# Altium PCB LY-3axis-4.0-v2.0-.PcbDoc (part 1 of 2)
Units mil, origin at the board's own origin, x right, y up, seen from the top; angles counter-clockwise.
Board outline 3940.6 x 3390.19 mil, 2 copper layers (TopLayer, BottomLayer); 147 components, 116 nets, 484 pads, 347 vias.
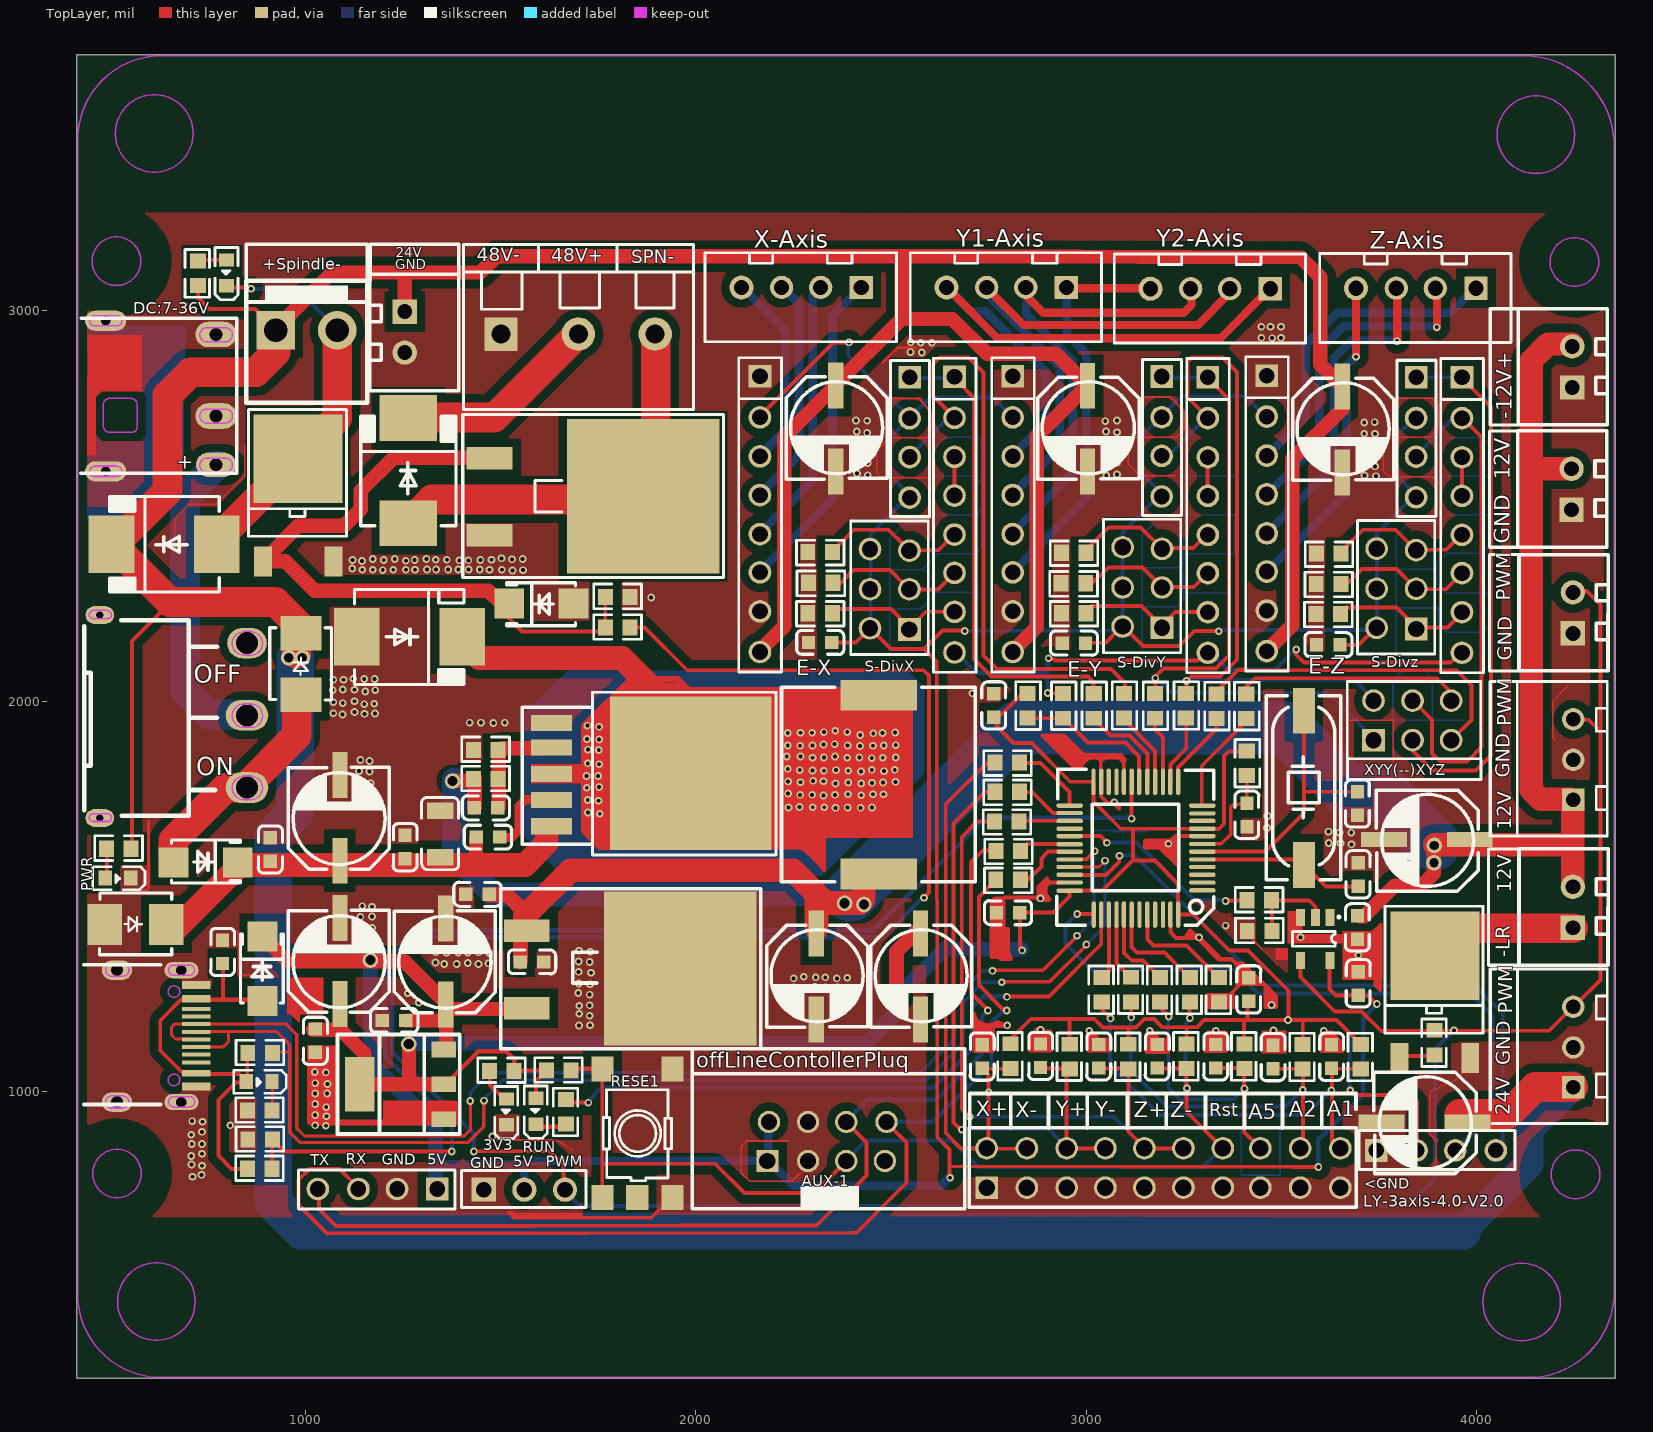
[diagram p0: TopLayer view]
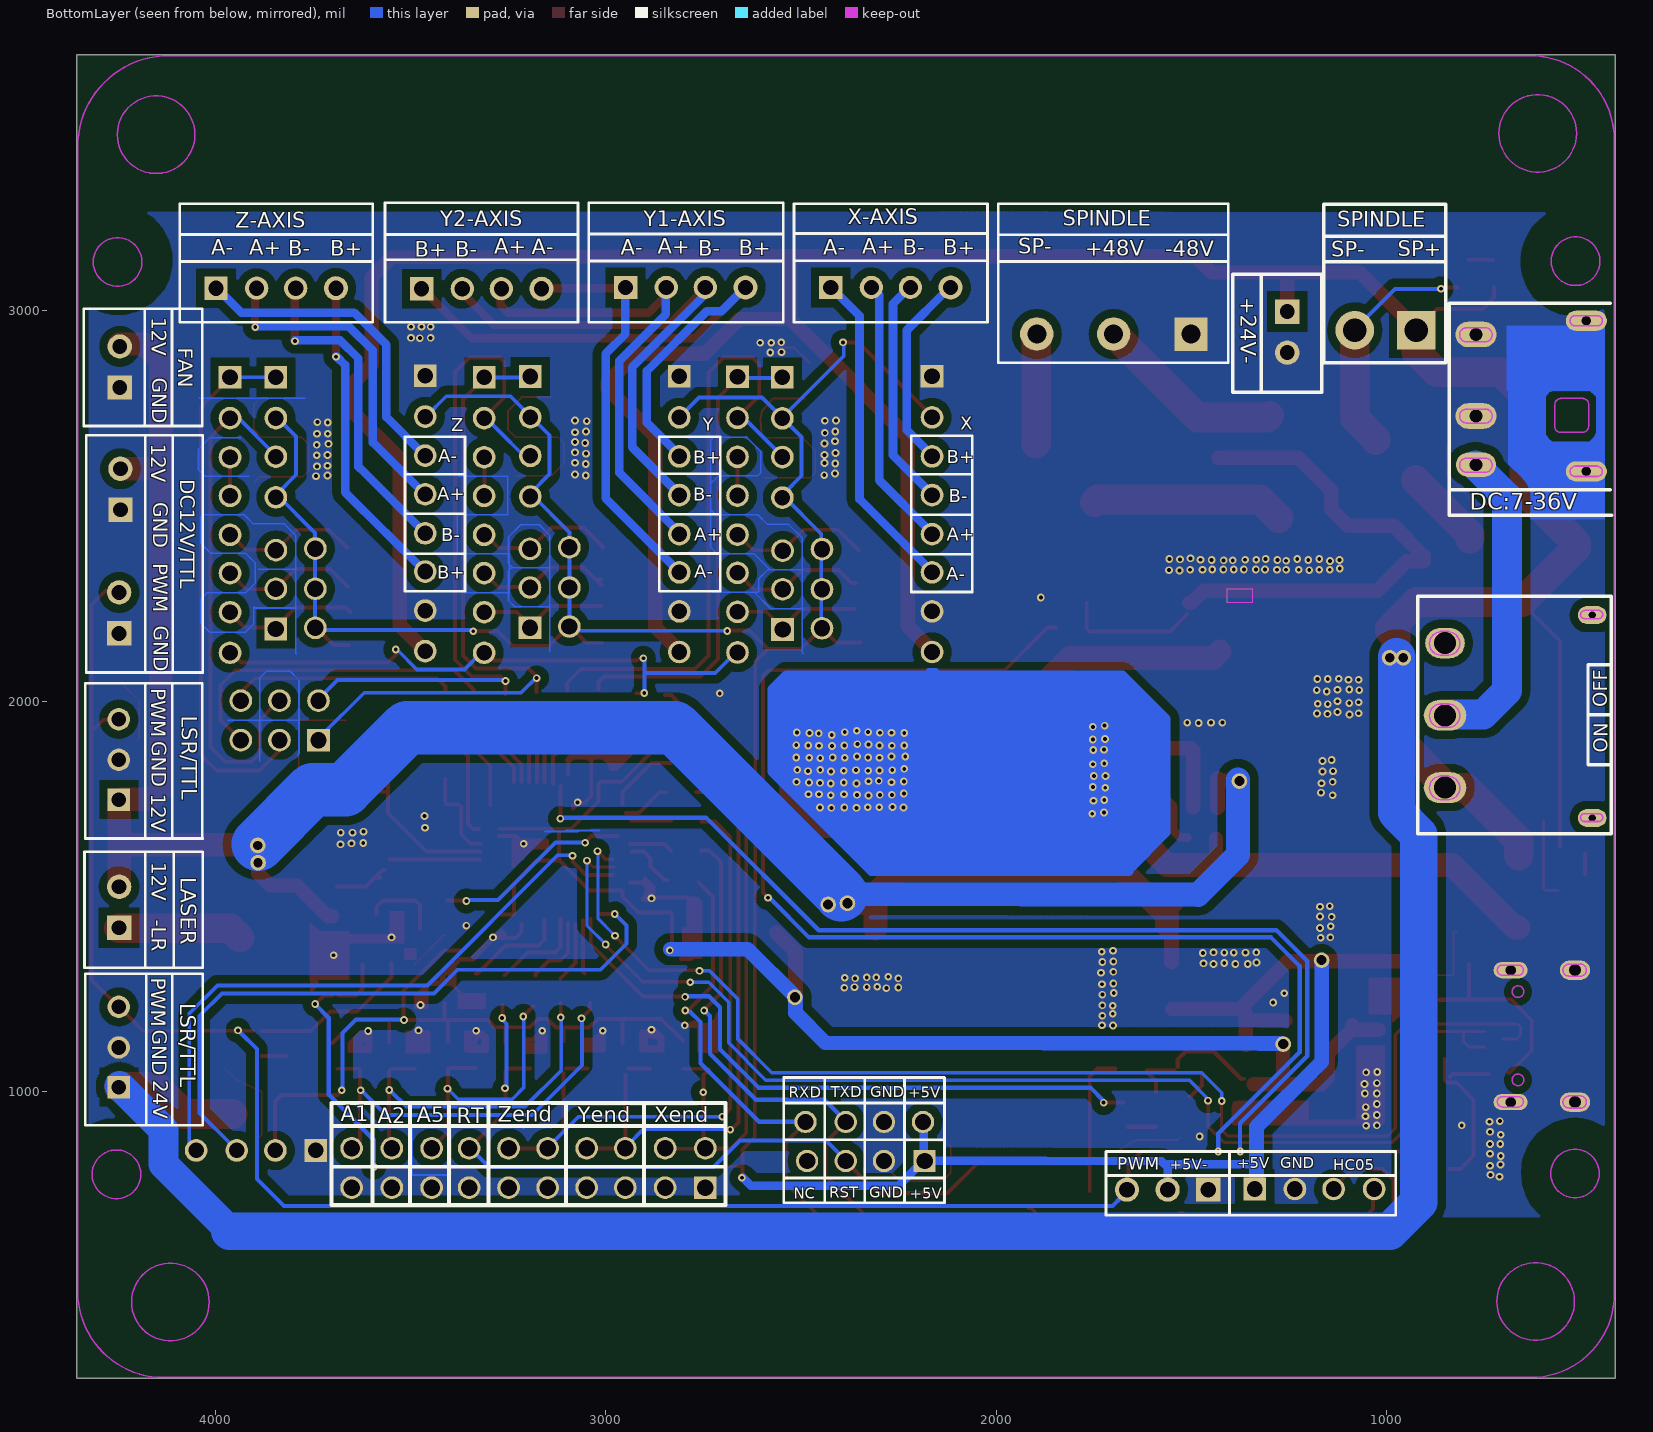
[diagram p1: BottomLayer view, seen from below]

## Layer stack, top to bottom
TopSolder: solder mask 0.4, Solder Resist, Dk 3.5
TopLayer: signal copper 1.4
Dielectric1: core 12.6, FR-4, Dk 4.8
BottomLayer: signal copper 1.4
BottomSolder: solder mask 0.4, Solder Resist, Dk 3.5

## Board outline
414.7,265.53 4355.3,265.53 4355.3,3655.72 414.7,3655.72

## Design rules (kind name [scope] priority, off if disabled: settings)
AssemblyTestPointUsage [All] p0: scope1count=1 scope1_0_kind=Board scope1_0_value=Board scope2count=1 scope2_0_kind=Board scope2_0_value=Board commentlength=0
AssemblyTestpoint [All] p0: scope1count=1 scope1_0_kind=Board scope1_0_value=Board scope2count=1 scope2_0_kind=Board scope2_0_value=Board commentlength=0
Clearance [All] p0: scope1count=1 scope1_0_kind=Board scope1_0_value=Board scope2count=1 scope2_0_kind=Board scope2_0_value=Board commentlength=0 gap=7.87
Clearance [All] p1: gap=7.87
ComponentClearance [All] p0: scope1count=1 scope1_0_kind=Board scope1_0_value=Board scope2count=1 scope2_0_kind=Board scope2_0_value=Board commentlength=0 gap=10 collisioncheckmode=3
DiffPairsRouting [All] p0: scope1count=1 scope1_0_kind=Board scope1_0_value=Board scope2count=1 scope2_0_kind=Board scope2_0_value=Board commentlength=0
FabricationTestPointUsage TestPointUsage [All] p0: scope1count=1 scope1_0_kind=Board scope1_0_value=Board scope2count=1 scope2_0_kind=Board scope2_0_value=Board commentlength=0 valid=0 allowmultiple=FALSE
FabricationTestPointUsage TestPointUsage [All] p1: valid=0 allowmultiple=FALSE
FabricationTestpoint Testpoint [All] p0: scope1count=1 scope1_0_kind=Board scope1_0_value=Board scope2count=1 scope2_0_kind=Board scope2_0_value=Board commentlength=0 side=3 testpointundercomponent=TRUE minsize=40 maxsize=100 preferedsize=60 minholesize=20 maxholesize=40 preferedholesize=32 testpointgrid=1
FabricationTestpoint Testpoint [All] p1: side=3 testpointundercomponent=TRUE minsize=40 maxsize=100 preferedsize=60 minholesize=20 maxholesize=40 preferedholesize=32 testpointgrid=1 allowsidetop=TRUE allowsidebottom=TRUE usegrid=TRUE gridtolerance=0.01
FanoutControl Fanout_Default [All] p0: scope1count=1 scope1_0_kind=Board scope1_0_value=Board scope2count=1 scope2_0_kind=Board scope2_0_value=Board commentlength=30 // Fanout_Default (Default Rule)
FanoutControl Fanout_Small [All] p0 off: scope1count=1 scope1_0_kind=Board scope1_0_value=Board scope2count=1 scope2_0_kind=Board scope2_0_value=Board commentlength=84 // Protel DXP Scope 1 Expression Was: (CompPinCount < 5)   Fanout_Small (Default Rule)
FanoutControl Fanout_SOIC [All] p0 off: scope1count=1 scope1_0_kind=Board scope1_0_value=Board scope2count=1 scope2_0_kind=Board scope2_0_value=Board commentlength=71 // Protel DXP Scope 1 Expression Was: IsSOIC   Fanout_SOIC (Default Rule)
FanoutControl Fanout_LCC [All] p0 off: scope1count=1 scope1_0_kind=Board scope1_0_value=Board scope2count=1 scope2_0_kind=Board scope2_0_value=Board commentlength=69 // Protel DXP Scope 1 Expression Was: IsLCC   Fanout_LCC (Default Rule)
FanoutControl Fanout_BGA [All] p0 off: scope1count=1 scope1_0_kind=Board scope1_0_value=Board scope2count=1 scope2_0_kind=Board scope2_0_value=Board commentlength=69 // Protel DXP Scope 1 Expression Was: IsBGA   Fanout_BGA (Default Rule)
Height [All] p0: scope1count=1 scope1_0_kind=Board scope1_0_value=Board scope2count=1 scope2_0_kind=Board scope2_0_value=Board commentlength=0
HoleSize [All] p0: scope1count=1 scope1_0_kind=Board scope1_0_value=Board scope2count=1 scope2_0_kind=Board scope2_0_value=Board commentlength=0 absolutevalues=TRUE maxlimit=100 minlimit=1 maxpercent=80.000 minpercent=20.000
HoleToHoleClearance [All] p0: scope1count=1 scope1_0_kind=Board scope1_0_value=Board scope2count=1 scope2_0_kind=Board scope2_0_value=Board commentlength=0
LayerPairs [All] p0: scope1count=1 scope1_0_kind=Board scope1_0_value=Board scope2count=1 scope2_0_kind=Board scope2_0_value=Board commentlength=0 enforce=TRUE
MinimumSolderMaskSliver [All] p0: scope1count=1 scope1_0_kind=Board scope1_0_value=Board scope2count=1 scope2_0_kind=Board scope2_0_value=Board commentlength=0
NetAntennae [All] p0: scope1count=1 scope1_0_kind=Board scope1_0_value=Board scope2count=1 scope2_0_kind=Board scope2_0_value=Board commentlength=0
PasteMaskExpansion [All] p0: scope1count=1 scope1_0_kind=Board scope1_0_value=Board scope2count=1 scope2_0_kind=Board scope2_0_value=Board commentlength=0 expansion=0
PlaneClearance [All] p0: scope1count=1 scope1_0_kind=Board scope1_0_value=Board scope2count=1 scope2_0_kind=Board scope2_0_value=Board commentlength=0 clearance=20
PlaneConnect [All] p0: scope1count=1 scope1_0_kind=Board scope1_0_value=Board scope2count=1 scope2_0_kind=Board scope2_0_value=Board commentlength=0 planeconnectstyle=Relief reliefexpansion=20 reliefentries=4 reliefconductorwidth=10 reliefairgap=10
PolygonConnect [All] p0: scope1count=1 scope1_0_kind=Board scope1_0_value=Board scope2count=1 scope2_0_kind=Board scope2_0_value=Board commentlength=0 connectstyle=Relief reliefconductorwidth=0 reliefentries=4 polygonreliefangle="90 Angle"
PolygonConnect [All] p1: connectstyle=Relief reliefconductorwidth=0 reliefentries=4 polygonreliefangle="90 Angle" airgapwidth=10
RoutingCorners [All] p0: scope1count=1 scope1_0_kind=Board scope1_0_value=Board scope2count=1 scope2_0_kind=Board scope2_0_value=Board commentlength=0 cornerstyle=45-Degree minsetback=100 maxsetback=100
RoutingLayers [All] p0: scope1count=1 scope1_0_kind=Board scope1_0_value=Board scope2count=1 scope2_0_kind=Board scope2_0_value=Board commentlength=0 top layer=Horizontal bottom layer=Vertical
RoutingPriority [All] p0: scope1count=1 scope1_0_kind=Board scope1_0_value=Board scope2count=1 scope2_0_kind=Board scope2_0_value=Board commentlength=0
RoutingTopology [All] p0: scope1count=1 scope1_0_kind=Board scope1_0_value=Board scope2count=1 scope2_0_kind=Board scope2_0_value=Board commentlength=0 topology=Shortest
RoutingVias [All] p0: scope1count=1 scope1_0_kind=Board scope1_0_value=Board scope2count=1 scope2_0_kind=Board scope2_0_value=Board commentlength=0 holewidth=28 width=50 viastyle="Through Hole" minholewidth=28 minwidth=50 maxholewidth=28 maxwidth=50
RoutingVias [All] p1: holewidth=28 width=50 viastyle="Through Hole" minholewidth=28 minwidth=50 maxholewidth=28 maxwidth=50
ShortCircuit [All] p0: scope1count=1 scope1_0_kind=Board scope1_0_value=Board scope2count=1 scope2_0_kind=Board scope2_0_value=Board commentlength=0 allowed=FALSE
SilkToBoardRegionClearance [All] p0: scope1count=1 scope1_0_kind=Board scope1_0_value=Board scope2count=1 scope2_0_kind=Board scope2_0_value=Board commentlength=0
SilkToSilkClearance [All] p0: scope1count=1 scope1_0_kind=Board scope1_0_value=Board scope2count=1 scope2_0_kind=Board scope2_0_value=Board commentlength=0
SilkToSolderMaskClearance [All] p0 off: scope1count=1 scope1_0_kind=Board scope1_0_value=Board scope2count=1 scope2_0_kind=Board scope2_0_value=Board commentlength=44 // Protel DXP Scope 1 Expression Was: IsPad
SolderMaskExpansion [All] p0: scope1count=1 scope1_0_kind=Board scope1_0_value=Board scope2count=1 scope2_0_kind=Board scope2_0_value=Board commentlength=0 expansion=4
SolderMaskExpansion [All] p1: expansion=4
UnRoutedNet [All] p0: scope1count=1 scope1_0_kind=Board scope1_0_value=Board scope2count=1 scope2_0_kind=Board scope2_0_value=Board commentlength=0
UnpouredPolygon [All] p0: scope1count=1 scope1_0_kind=Board scope1_0_value=Board scope2count=1 scope2_0_kind=Board scope2_0_value=Board commentlength=0
Width [All] p0: scope1count=1 scope1_0_kind=Board scope1_0_value=Board scope2count=1 scope2_0_kind=Board scope2_0_value=Board commentlength=0 maxlimit=10 minlimit=10 preferedwidth=10
Width [All] p1: maxlimit=10 minlimit=10 preferedwidth=10
28 further rules are at their usual default settings.

## Components (designator, comment, footprint, x,y, rotation, side; value= is the part's Value field where it differs from the comment)
? "" 1#1 1337.92,750.42 r0 top locked
? "" 1#1 3743.75,849.17 r180 top locked
? "" 5 1457.08,748.75 r0 top locked
? "" 1#2 3845.42,2828.33 r90 top locked
? "" 1#2 3193.75,2830.42 r90 top locked
? "" 1#3 2547.92,2827.5 r90 top locked
? "" 2 2164.58,2832.08 r0 top locked
? "" 2 2662.92,2830.83 r0 top locked
? "" 2 2812.08,2832.08 r0 top locked
? "" 2 3312.08,2830 r0 top locked
? "" 2 3462.92,2834.17 r0 top locked
? "" 2 3962.92,2830 r0 top locked
? "" 3#1 3845.42,2185 r0 top locked
? "" 3#1 3194.58,2188.33 r0 top locked
? "" 3#1 2547.5,2183.75 r0 top locked
? "" 3#2 3733.33,1900.42 r270 top locked
? "" 4 2745.42,753.75 r0 top locked
? "" 6 2183.75,822.08 r0 top locked
? "" 7 1254.58,2892.92 r0 top locked
? "" 7 4247.08,1524.58 r180 top locked
? "" 7 4247.08,2278.75 r180 top locked
? "" 7 4243.75,2595.42 r180 top locked
? "" 7 4245.42,2908.75 r180 top locked
? "" 8 923.75,2950.42 r0 top locked
? "" 9 4247.93,1217.08 r0 top locked
? "" 9 4247.92,1953.75 r0 top locked
? "" 99 3691.67,3057.92 r0 top locked
? "" 99 3165,3056.67 r0 top locked
? "" 99 2642.5,3060 r0 top locked
? "" 99 2117.08,3060 r0 top locked
? "" 98 1501.25,2940.42 r0 top locked
? "" 97 850.42,2148.75 r0 top locked
? "" 95 771.25,2939.58 r0 top locked
? "" 93 720.42,1272.92 r0 top locked
? "" 94 1630.42,1943.75 r0 top locked
? "" 92 1567.08,1412.08 r0 top locked
? "" 91 1472.08,2622.08 r0 top locked
? "" 90#1 891.25,2358.33 r0 top locked
? "" 90#2 3802.92,1085.42 r0 top locked
? "" 89#1 1263.75,2455.42 r0 top locked
? "" 89#1 773.33,2402.08 r90 top locked
? "" 89#2 1131.67,2164.58 r270 top locked
? "" 88 2468.75,1557.08 r0 top locked
? "" 87 1088.33,1591.25 r0 top locked
? "" 87 1359.58,1223.33 r0 top locked
? "" 87 1088.33,1224.58 r0 top locked
? "" 87 2308.75,1404.58 r180 top locked
? "" 87 2575.42,1404.58 r180 top locked
? "" 87 3977.08,922.08 r90 top locked
? "" 87 3982.92,1645.42 r90 top locked
? "" 87 3656.25,2805.83 r180 top locked
? "" 87 3003.75,2808.33 r180 top locked
? "" 87 2358.75,2808.75 r180 top locked
? "" 86 1761.25,728.75 r0 top locked
? "" 84 1354.58,928.75 r0 top locked
? "" 83 3558.75,1580.42 r0 top locked
? "" 82 988.75,2016.25 r0 top locked
? "" 82 485.83,1428.33 r270 top locked
? "" 85 890.42,1232.08 r0 top locked
? "" 85 662.08,1587.08 r270 top locked
? "" 85 1687.08,2250.42 r90 top locked
? "" 81 3624.58,1446.25 r0 top locked
? "" 80 915.42,1098.75 r0 top locked
? "" 80 914.58,951.25 r0 top locked
? "" 80 915.42,877.08 r0 top locked
? "" 80 914.58,802.08 r0 top locked
? "" 80 1534.58,1052.92 r0 top locked
? "" 80 1680.42,1053.75 r0 top locked
? "" 80 1667.92,979.58 r90 top locked
? "" 80 553.75,1622.08 r0 top locked
? "" 80 1493.75,1800.42 r0 top locked
? "" 80 1493.75,1875.42 r0 top locked
? "" 80 1832.08,2267.08 r0 top locked
? "" 80 1832.08,2188.75 r0 top locked
? "" 80 724.58,3127.92 r90 top locked
? "" 80 2287.08,2382.08 r180 top locked
? "" 80 2288.75,2303.33 r180 top locked
? "" 80 2287.08,2225.42 r180 top locked
? "" 80 2937.08,2380.42 r180 top locked
? "" 80 2936.25,2302.08 r180 top locked
? "" 80 2937.08,2225.42 r180 top locked
? "" 80 2768.75,1542.5 r180 top locked
? "" 80 2769.17,1616.67 r180 top locked
? "" 80 2765.42,1692.08 r180 top locked
? "" 80 2766.67,1767.92 r180 top locked
? "" 80 2766.67,1842.92 r180 top locked
? "" 80 2850,1956.67 r270 top locked
? "" 80 2941.25,1956.25 r270 top locked
? "" 80 3019.58,1956.25 r270 top locked
? "" 80 3097.08,1957.08 r270 top locked
? "" 80 3176.25,1956.25 r270 top locked
? "" 80 3255.42,1957.08 r270 top locked
? "" 80 3333.75,1955.42 r270 top locked
? "" 80 3410.42,1955.42 r270 top locked
? "" 80 3411.67,1809.17 r270 top locked
? "" 80 3475.42,1490 r0 top locked
? "" 80 3475.83,1411.25 r0 top locked
? "" 80 3340.42,1292.5 r90 top locked
? "" 80 3265.83,1292.5 r90 top locked
? "" 80 3189.58,1292.08 r90 top locked
? "" 80 3115.42,1292.92 r90 top locked
? "" 80 3040,1292.5 r90 top locked
? "" 80 2806.67,1122.5 r90 top locked
? "" 80 2958.33,1121.25 r90 top locked
? "" 80 3107.92,1121.25 r90 top locked
? "" 80 3257.08,1122.08 r90 top locked
? "" 80 3405.42,1122.08 r90 top locked
? "" 80 3554.58,1120.42 r90 top locked
? "" 80 3703.75,1120.42 r90 top locked
? "" 80 3892.92,1157.08 r90 top locked
? "" 80 3588.75,2223.75 r180 top locked
? "" 80 3589.58,2300.42 r180 top locked
? "" 80 3590.42,2377.92 r180 top locked
? "" 79 1497.92,1652.08 r0 top locked
? "" 79 1492.92,1727.08 r0 top locked
? "" 79 1471.25,1505.42 r0 top locked
? "" 79 1255.42,1656.25 r90 top locked
? "" 79 910.42,1650.42 r90 top locked
? "" 79 787.92,1387.92 r90 top locked
? "" 79 1025.42,1160.42 r90 top locked
? "" 79 1550.42,1332.08 r180 top locked
? "" 79 1197.08,1182.08 r180 top locked
? "" 79 2288.75,2150.42 r180 top locked
? "" 79 2938.75,2148.75 r180 top locked
? "" 79 2763.75,1958.75 r270 top locked
? "" 79 3590.42,2144.58 r180 top locked
? "" 79 3412.08,1678.75 r270 top locked
? "" 79 3695.42,1707.92 r270 top locked
? "" 79 3697.08,1526.25 r270 top locked
? "" 79 3695.42,1390.42 r270 top locked
? "" 79 3697.5,1247.08 r270 top locked
? "" 79 3417.08,1231.25 r270 top locked
? "" 79 2830.42,1458.33 r0 top locked
? "" 79 2733.75,1120 r90 top locked
? "" 79 2883.33,1121.67 r90 top locked
? "" 79 3032.08,1120.42 r90 top locked
? "" 79 3182.08,1120.42 r90 top locked
? "" 79 3332.08,1120.42 r90 top locked
? "" 79 3478.75,1118.75 r90 top locked
? "" 79 3628.75,1119.58 r90 top locked
? "" 77 1590.42,982.5 r0 top locked
? "" 77 1515,980.83 r0 top locked
? "" 77 848.75,1025.42 r90 top locked
? "" 77 487.08,1547.08 r90 top locked
? "" 77 798.33,3130.42 r0 top locked
? "" 76 1345.42,1600.42 r0 top locked
? "" 55 3297.92,1515.42 r0 top locked

## Footprints (in the part's own frame and the unit in brackets; to place one, negate y for a bottom-side part, rotate by r counter-clockwise, add the part's x,y. Pads: shape width x height; smd on the part's side, far side on the other; paste and mask are expansions set on the pad)
1#1 [mil]
  rect 58x58 hole 40: 1(0,0)
  round 58 hole 40: 2(-103,0) 3(-202,0) 4(-306,0)
  silkscreen extent -355,-51 45,49
1#2 [mil]
  rect 58x58 hole 40: 1(1.41,0)
  round 58 hole 40: 2(-103,0) 3(-202,0) 4(-306,0.01)
  silkscreen extent -355,-51 45,49
1#3 [mil]
  rect 58x58 hole 40: 1(2.24,0)
  round 58 hole 40: 2(-103,0) 3(-202,0) 4(-306,0.01)
  silkscreen extent -355,-51 45,49
2 [mil]
  rect 58x58 hole 40: 1(0,0)
  round 58 hole 40: 2(0,-105) 3(0,-205) 4(0,-304) 5(0,-404) 6(0,-502) 7(0,-602) 8(0,-706)
  silkscreen extent -54,-757 55,48
3#1 [mil]
  rect 58x58 hole 42: 1(0,0)
  round 58 hole 42: 2(-101,3) 3(0,103) 4(-101,103) 5(0,202) 6(-101,206)
  silkscreen extent -150,-64 48,278
3#2 [mil]
  rect 58x58 hole 42: 1(0,3)
  round 58 hole 42: 2(-101,3) 3(0,103) 4(-101,103) 5(0,202) 6(-101,202)
  silkscreen extent -150,-64 48,278
4 [mil]
  rect 58x58 hole 42: 1(0,0)
  round 58 hole 42: 2(0,101) 3(103,0) 4(103,101) 5(205,0) 6(205,101) 7(304,0) 8(304,101) 9(404,0) 10(404,101) 11(504,0) 12(504,101) 13(605,0) 14(605,101) 15(701,0) 16(701,101) 17(803,0) 18(803,101) 19(906,0) 20(906,101)
  silkscreen extent -45,-50 947,154
5 [mil]
  rect 62x62 hole 40: 1(0,0)
  round 62 hole 40: 2(104,0) 3(208,0)
  silkscreen extent -57,-46 262,49
6 [mm]
  rect 1.45x1.45 hole 1.067: 1(0,0)
  round 1.45 hole 1.067: 2(0.102,2.54) 3(2.642,0) 4(2.642,2.54) 5(5.131,0) 6(5.131,2.54) 7(7.645,0) 8(7.747,2.54)
  silkscreen extent -4.88,-3.1 12.83,7.29
7 [mm]
  round 1.58 hole 0.965: 1(0,0)
  rect 1.58x1.58 hole 0.965: 2(0,2.667)
  silkscreen extent -2.29,-2.46 3.51,5.11
8 [mil]
  rect 99.09x99.09 hole 60: 1(0,0)
  round 99.09 hole 60: 2(158,0)
  silkscreen extent -75,-186 235,127
9 [mm]
  round 1.46 hole 0.96: 1(0,0) 2(0,-2.642)
  rect 1.46x1.46 hole 0.96: 3(0,-5.232)
  silkscreen extent -3.63,-7.59 2.21,2.46
55 [mil]
  oval 68.16x11.02 smd: 1(0,0) 2(0,20) 3(0,40) 4(0,60) 5(0,79) 6(0,99) 7(0,119) 8(0,139) 9(0,158) 10(0,178) 11(0,197) 12(0,217) 25(-340,217) 26(-340,198) 27(-340,178) 28(-340,158) 29(-340,139) 30(-340,118) 31(-340,99) 32(-340,79) 33(-340,60) 34(-340,40) 35(-340,20) 36(-340,-1)
  oval 11.02x68.16 smd: 13(-62,278) 14(-82,278) 15(-101,278) 16(-121,278) 17(-141,278) 18(-162,278) 19(-181,278) 20(-201,278) 21(-220,278) 22(-240,278) 23(-259,278) 24(-279,278) 37(-278,-62) 38(-259,-62) 39(-240,-62) 40(-220,-62) 41(-201,-62) 42(-181,-62) 43(-161,-62) 44(-141,-62) 45(-121,-62) 46(-101,-62) 47(-82,-62) 48(-62,-62)
  silkscreen extent -373,-90 29,310
76 [mil]
  rect 68.16x42.16 smd: 1(0,0) 2(0,119)
  silkscreen extent -48,-32 47,153
77 [mil]
  rect 38.16x34.16 smd: 1(0,0) 2(0,-66)
  silkscreen extent -30,-102 29,32
79 [mil]
  rect 34.16x34.16 smd: 1(0,0) 2(-60,0)
  silkscreen extent -91,-31 30,31
80 [mm]
  rect 0.969x1.05 smd: 1(0,0) 2(-1.6,0)
  silkscreen extent -2.36,-0.76 0.74,0.84
81 [mm]
  rect 0.578x1.1 smd: 1(0,0) 2(-0.94,0) 3(-1.905,0) 4(-1.905,-2.819) 5(0,-2.819)
  silkscreen extent -2.44,-1.88 0.63,0.08
82 [mil]
  rect 104.74x88.16 smd: 1(0,0) 2(0,158)
  silkscreen extent -80,-13 78,172
83 [mil]
  rect 56.16x116.74 smd: 1(0,0) 2(-1,395)
  silkscreen extent -97,-38 94,434
84 [mil]
  rect 62.74x40.16 smd: 1(0,0) 2(0,90) 3(0,179)
  rect 76.16x140.74 smd: 4(-215,90)
  silkscreen extent -272,-37 41,217
85 [mil]
  rect 76.74x76.16 smd: 1(0,0) 2(0,165)
  silkscreen extent -57,-5 53,172
86 [mil]
  rect 56.74x63.37 smd: 1(0,0) 2(89,0) 3(179,0) 4(179,329) 5(0,329)
  silkscreen extent 2,43 177,276
87 [mil]
  rect 38.74x117.37 smd: 1(0,0) 2(0,220)
  silkscreen extent -132,-22 127,240
88 [mm]
  rect 4.962x2 smd: 1(0,0) 2(0,11.633)
  silkscreen extent -6.32,-0.51 6.27,12.17
89#1 [mil]
  rect 147.37x116.74 smd: 1(0,0) 2(0,270)
  silkscreen extent -123,-6 122,277
89#2 [mil]
  rect 147.37x116.74 smd: 1(0,0) 2(0,270)
  KeepOutLayer region: -88,212 -88,277 -123,277 -123,212
  silkscreen extent -122,-6 122,275
90#1 [mil]
  rect 45.37x76.74 smd: 1(0,0) 3(181,0)
  rect 227.37x226.74 smd: 2(90,263)
  silkscreen extent -37,64 214,389
90#2 [mil]
  rect 45.37x76.74 smd: 1(0,0) 3(181,0)
  rect 227.37x226.74 smd: 2(90.8,263)
  silkscreen extent -37,64 214,389
91 [mil]
  rect 117.48x58.24 smd: 1(0,0) 3(0,-197)
  rect 390.55x395.28 smd: 2(393,-97)
  silkscreen extent -69,-305 599,112
92 [mil]
  rect 117.48x58.24 smd: 1(0,0) 3(0,-199)
  rect 390.55x395.28 smd: 2(393,-97)
  silkscreen extent -67,-303 600,108
93 [mil]
  rect 73.48x21.48 smd: 1(0,0) 12(0,-260)
  rect 73.48x18.9 smd: 2(0,-35)
  rect 73.48x10.24 smd: 3(0,-61) 4(0,-81) 5(0,-100) 6(0,-120) 7(0,-139) 8(0,-159) 9(0,-178) 10(0,-198)
  rect 73.48x17.72 smd: 11(0,-226)
  oval 87.48x41.48 hole 26.58: 13(-38,38) 14(-38,-300)
  oval 77.48x49.48 hole 30.58: 15(-203,38) 16(-203,-300)
  KeepOutLayer circle w4: c-57,-17 r15
  KeepOutLayer circle w4: c-57,-243 r15
  KeepOutLayer lines w4: -218,-315 -188,-315 ; -218,22 -188,22 ; -217.07,-315.96 cw(c-216,-300) -217.09,-284.04 ; -217.07,22.04 cw(c-216,38) -217.09,53.96 ; -217,-284 -186,-284 ; -217,53 -186,53 ; -186.29,-285.02 cw(c-187,-300) -185.89,-314.96 ; -186.29,52.98 cw(c-187,38) -185.89,23.04 ; -59,-313 -17,-313 ; -59,-286 -17,-286 ; -59,25 -17,25 ; -59,51 -17,51 ; -58.7,-311.98 cw(c-58,-299) -58.7,-286.02 ; -58.7,25.02 cw(c-58,38) -58.7,50.98 ; -16.8,-312 ccw(c-17,-299) -16.8,-286 ; -16.8,25 ccw(c-17,38) -16.8,51
  silkscreen extent -288,-306 -91,52
94 [mil]
  rect 104.74x41.37 smd: 1(0,0) 2(0,-62) 3(0,-130) 4(0,-197) 5(0,-264)
  rect 413.39x393.7 smd: 6(357,-128)
  silkscreen extent -75,-338 575,79
95 [mil]
  oval 105.48x65.48 hole 32.58: 1(0,0) 2(0,-209)
  oval 102.36x62.99 hole 32.58: 3(0,-334)
  oval 105.48x51.48 hole 24.58: 6(-283,35) 7(-283,-351)
  KeepOutLayer lines w4: -311.41,-363.99 cw(c-311,-351) -311.41,-338.01 ; -311.41,22.01 cw(c-311,35) -311.41,47.99 ; -311,-364 -254,-364 ; -311,-337 -254,-337 ; -311,22 -254,22 ; -311,48 -254,48 ; -253.69,-364 ccw(c-254,-351) -253.69,-338 ; -253.69,22 ccw(c-254,35) -253.69,48 ; -25,-353 25,-353 ; -25,-317 25,-317 ; -25,-227 25,-227 ; -25,-192 25,-192 ; -25,-19 25,-19 ; -25,17 25,17 ; -24.63,-352.99 cw(c-24,-335) -24.63,-317.01 ; -24.63,-226.99 cw(c-24,-209) -24.63,-191.01 ; -24.63,-18.99 cw(c-24,-1) -24.63,16.99 ; 25.16,-352.96 ccw(c24,-335) 25.17,-317.04 ; 25.16,-226.96 ccw(c24,-209) 25.17,-191.04 ; 25.16,-18.96 ccw(c24,-1) 25.17,16.96 ; -289,-234 ccw(c-272,-234) -272,-251 -217,-251 ccw(c-217,-236) -202,-236 -202,-180 ccw(c-218,-180) -218,-164 -273,-164 ccw(c-273,-180) -289,-180 -289,-234
  silkscreen extent -346,-356 53,42
97 [mil]
  oval 101.48x77.48 hole 56.58: 1(0,0)
  oval 109.06x78.74 hole 56.58: 2(0,-185) 3(0,-370)
  oval 73.48x45.48 hole 18.58: 4(-377,72) 5(-377,-448)
  KeepOutLayer lines w4: -396,-437 -358,-437 ; -396,84 -358,84 ; -395,-457 -358,-457 ; -395,63 -358,63 ; -394.65,-456.98 cw(c-394,-447) -394.65,-437.02 ; -394.65,63.02 cw(c-394,73) -394.65,82.98 ; -357.65,-456.98 ccw(c-357,-447) -357.65,-437.02 ; -357.65,63.02 ccw(c-357,73) -357.65,82.98 ; -10,-401 12,-401 ; -10,-340 12,-340 ; -10,-216 12,-216 ; -10,-156 12,-156 ; -10,-31 12,-31 ; -10,30 12,30 ; -9.85,-400.94 cw(c-8,-371) -9.85,-341.06 ; -9.85,-215.94 cw(c-8,-186) -9.85,-156.06 ; -9.85,-30.94 cw(c-8,-1) -9.85,28.94 ; 11.44,-400.97 ccw(c10,-371) 11.44,-341.03 ; 11.44,-215.97 ccw(c10,-186) 11.44,-156.03 ; 11.44,-30.97 ccw(c10,-1) 11.44,28.97
  silkscreen extent -417,-442 -77,59
98 [mil]
  rect 85.48x85.48 hole 48.58: 1(0,0)
  round 85.48 hole 48.58: 2(198,0) 3(395,0)
  silkscreen extent -96,-193 493,159
99 [mm]
  round 1.562 hole 0.98: 1(0,0)
  round 1.511 hole 0.98: 2(2.616,0) 3(5.156,0)
  rect 1.511x1.511 hole 0.98: 4(7.798,0)
  silkscreen extent -2.36,-3.53 10.08,2.26

## Free pads (board coordinates)
  round 40.16 hole 26: 49(1377.08,1795.42) 50(1166.67,1336.67) 51(1265,1121.67) 54(2515.83,1241.67) 55(2430.83,1479.17) 56(2381.25,1482.5)
  round 40.16 hole 24: 52(3892.08,1630.42) 53(3891.25,1586.25) 57(957.5,2111.25) 58(992.5,2111.25)

## Via types
v1: diameter 19.68, hole 9.84, TopLayer to BottomLayer, tented both sides, 347 vias

## Nets (pads, with @x,y where several pads share a name; then routed paths per layer and width w, separated by ;. In a path a pad name is that pad's centre, name@x,y a point inside that pad or via, vN(x,y) a via of type N, cw(c..) or ccw(c..) an arc to the next point about the centre after c; other vN are vias at no path point)
UnNamedNet1: ?.1@2769.17,1616.67 ?.4@1031.92,750.42 ?.6@2385.75,922.08 | length 2661.3
  TopLayer w9.94: ?.4@1035.42,735.83 1035.42,698.75 1078.33,655.83 1080.83,655.83 1587.5,655.83 1960.42,657.08 2309.58,657.08 2311.25,658.75 2437.5,785 2437.5,869.58 2392.5,914.58 ?.6@2383.33,914.58 ; v1@2751.25,1206.67 2705.42,1252.5 2705.42,1587.92 2735.42,1617.92 ?.1@2756.67,1617.92
  BottomLayer w10.94: ?.6@2388.75,927.92 2440,979.17 2615.83,979.17 2733.33,1096.67 2733.33,1193.33 2733.75,1193.75 2745.83,1205.83 v1@2745.83,1207.08
  other v1: 2748.33,1207.5
UnNamedNet2: ?.1@2768.75,1542.5 ?.3@1135.92,750.42 ?.8@2488.75,922.08 | length 2885.9
  TopLayer w9.94: ?.3@1131.67,762.5 1126.67,762.5 1087.08,802.08 1010.42,802.08 982.5,774.17 982.5,709.17 1055,636.67 2396.25,638.33 2411.67,638.33 2539.58,766.25 2539.58,869.58 ?.8@2495.83,913.33 ; ?.1@2763.33,1536.25 2725.42,1498.33 2725.42,1272.5 2787.5,1210.42 v1@2795.42,1210.42
  BottomLayer w10.94: ?.8@2507.08,922.5 2607.92,922.5 2757.92,1072.5 2757.92,1177.92 2784.17,1204.17 2786.67,1204.17 v1@2790.42,1207.92
  other v1: 2796.67,1207.5
UnNamedNet3: ?.1@485.83,1428.33 ?.1@720.42,1272.92 ?.1@771.25,2939.58 ?.1@787.92,1387.92 ?.1@910.42,1650.42 ?.1@1131.67,2164.58 ?.1@1197.08,1182.08 ?.1@1254.58,2892.92 ?.1@1255.42,1656.25 ?.1@1354.58,928.75 ?.1@1457.08,748.75 ?.1@1501.25,2940.42 ?.1@1630.42,1943.75 ?.1@1687.08,2250.42 ?.1@1832.08,2267.08 ?.1@2164.58,2832.08 ?.1@2287.08,2225.42 ?.1@2287.08,2382.08 ?.1@2288.75,2150.42 ?.1@2288.75,2303.33 ?.1@2733.75,1120 ?.1@2745.42,753.75 ?.1@2812.08,2832.08 ?.1@2883.33,1121.67 ?.1@2936.25,2302.08 ?.1@2937.08,2225.42 ?.1@2937.08,2380.42 ?.1@2938.75,2148.75 ?.1@3032.08,1120.42 ?.1@3182.08,1120.42 ?.1@3332.08,1120.42 ?.1@3412.08,1678.75 ?.1@3462.92,2834.17 ?.1@3478.75,1118.75 ?.1@3588.75,2223.75 ?.1@3589.58,2300.42 ?.1@3590.42,2144.58 ?.1@3590.42,2377.92 ?.1@3628.75,1119.58 ?.1@3695.42,1390.42 ?.1@3695.42,1707.92 ?.1@3743.75,849.17 ?.2@553.08,1547.08 ?.2@771.25,2730.58 ?.2@851.58,951.25 ?.2@852.42,877.08 ?.2@1025.42,1100.42 ?.2@1088.33,1444.58 ?.2@1088.33,1811.25 ?.2@1234.92,750.42 ?.2@1345.42,1719.42 ?.2@1359.58,1443.33 ?.2@1411.25,1505.42 ?.2@1430.75,1875.42 ?.2@1515,914.83 ?.2@1610.42,1332.08 ?.2@1960.08,1315.08 ?.2@2308.75,1184.58 ?.2@2358.75,2588.75 ?.2@2575.42,1184.58 ?.2@2763.75,2018.75 ?.2@2770.42,1458.33 ?.2@3003.75,2588.33 ?.2@3340.41,1229.5 ?.2@3412.83,1411.25 ?.2@3417.08,1291.25 ?.2@3656.25,2585.83 ?.2@3697.5,1307.08 ?.2@3697.08,1586.25 ?.2@3757.08,922.09 ?.2@3762.92,1645.42 ?.2@4243.75,2490.42 ?.2@4245.42,2803.75 ?.2@4247.08,2173.75 ?.2@4247.92,1849.75 ?.2@4247.93,1113.08 ?.3@1072.25,2358.33 ?.3@1472.08,2425.08 ?.3@1940.25,728.75 ?.3@2287.75,822.08 ?.3@2848.42,753.75 ?.3@3549.58,1446.25 ?.3@3983.92,1085.42 ?.4@1940.25,1057.75 ?.4@2287.75,922.08 ?.5@2950.42,753.75 ?.6@488.25,2974.58 ?.7@488.25,2588.58 ?.7@2164.58,2230.08 ?.7@2812.08,2230.08 ?.7@3049.42,753.75 ?.7@3462.92,2232.17 ?.8@3297.92,1654.42 ?.9@3149.42,753.75 ?.11@3249.42,753.75 ?.12@720.42,1012.92 ?.13@682.42,1310.92 ?.13@3350.42,753.75 ?.14@682.42,972.92 ?.15@517.42,1310.92 ?.15@3446.42,753.75 ?.16@517.42,972.92 ?.17@3548.42,753.75 ?.19@3651.42,753.75 ?.20@3096.92,1793.42 ?.23 ?.35 ?.47 | length 19811
  TopLayer w3.94: 665,2392.92 665,2468.75 700.42,2504.17 771.25,2504.17 844.17,2577.08 844.17,2652.5 841.67,2655 ; 818.33,1409.58 828.75,1409.58 828.75,1297.5 874.17,1297.5 ; 2236.67,875.42 2234.58,873.33 2130,873.33 2116.67,860 2116.67,792.08 2138.75,770 2245.83,770 ?.3@2286.25,810.42 ; 2592.5,2675.42 2592.08,2675 2496.67,2675 2463.33,2641.67 2463.33,2585.42 2475.83,2572.92 2595,2572.92 ; 3230,2577.08 3140,2577.08 3108.33,2608.75 3108.33,2662.08 3122.92,2676.67 3232.08,2676.67 3250.83,2695.42 ; ?.2@3410.42,1400.42 3415.42,1400.42 3490.42,1325.42 ; 3665.42,1951.25 3785.83,1951.25 3786.67,1952.08 3786.67,1827.5 3787.92,1826.25 ; 3779.58,2777.92 3780.83,2776.67 3884.58,2776.67 3902.08,2759.17 3902.08,2696.67 3882.08,2676.67 3780.42,2676.67 3760.83,2657.08 3760.83,2590.83 3777.08,2574.58 3887.92,2574.58 3902.5,2560 ; 3897.08,794.17 3896.67,794.58 3896.67,874.58 3881.25,890 3881.25,999.17 3945.83,1029.58 ?.3@3975.83,1057.5 ; 4202.5,1898.75 4195.83,1905.42 4195.83,2000.83 4235,2040
  TopLayer w4.94: 1529.58,882.08 1533.75,877.92 1535.42,876.25 1633.33,876.25 1649.17,872.92 1685.83,849.58 ; 2491.67,2775.42 2492.08,2775.83 2571.67,2775.83 2600,2744.17 2603.75,2723.33 2601.25,2685.83 2592.5,2675.42 ; 3140.83,2778.33 3141.25,2778.75 3215.83,2778.75 3250.83,2743.75 3250.83,2695.42
  TopLayer w5.87: 2479.17,2866.46 2479.17,2867.5 2517.29,2905.62 2565.21,2905.62
  TopLayer w6.87: 560.83,1515 592.92,1515 598.33,1520.42 598.33,1691.67 597.5,1692.5
  TopLayer w7.87: 460,2781.25 467.92,2789.17 475,2794.58 460.83,2790
  TopLayer w7.94: 2713.33,1183.33 2713.75,1200.42 2718.75,1180.83 ; ?.1@2740.42,1120 2752.92,1108.75
  TopLayer w8.94: 1535.42,684.58 1707.08,684.58 1707.08,681.67 1540,681.67 1532.5,689.17 1520.83,689.17 1533.75,676.25 1885.83,676.25 1910.83,701.25 ?.3@1917.08,701.25 ; ?.2@3357.5,1240.42 3360.42,1240.42 ?.2@3404.17,1284.17 ; 3384.17,1329.17 3401.67,1329.17 3455.83,1275 3390.42,1275 3386.67,1271.25 3386.67,1324.17 3388.75,1324.17 ; 3392.08,1323.75 3404.58,1315.83 3397.08,1326.67 3446.25,1277.5 3409.17,1284.17 3393.75,1280.42 3392.08,1312.08 3398.33,1314.17 3410.83,1300.42 3421.67,1289.58 3402.92,1286.25 3400,1295 3400,1305.83 3400,1281.67 ; 3447.08,1279.58 3452.92,1279.58 3487.08,1245.42 3487.08,1215.42 3459.17,1215.42 3459.17,1270 3469.17,1254.17 ; 3735.83,1397.92 3735.83,1408.75 3754.58,1427.5 3754.58,1393.33 ; 3741.25,1297.08 3741.25,1272.08 3753.75,1259.58 3753.75,1289.58 3751.25,1285.42 3749.58,1271.25 3747.08,1286.25 ; 3745.83,1405.83 3750,1418.33
  TopLayer w9.94: 2775.42,1480.83 2791.25,1496.67 v1@2880.83,1496.67 ; 2896.67,1535.83 ?.35@2938.75,1535.83 ; 2984.17,1862.92 3089.58,1862.92 3100,1849.58 3086.25,1855 3049.17,1855 3047.08,1852.92 3037.08,1846.67 ; 2989.58,1858.75 3051.25,1858.75 ; 2997.5,1863.75 2986.67,1868.33 2943.33,1911.67 2888.75,1911.67 2973.75,1826.67 2987.5,1826.67 2988.75,1834.58 2992.92,1841.67 3003.33,1851.67 3014.17,1856.25 3025.42,1856.25 3032.92,1852.5 ; 3037.5,1854.58 3037.5,1757.08 3055,1739.58 3069.17,1739.58 3084.17,1724.58 3084.17,1734.17 3082.5,1735.83 v1@3075.42,1735.83 ; 3052.5,1859.17 3083.33,1859.17 ; 3083.75,1855.42 3096.67,1842.5 ?.20@3096.67,1811.25 ; v1@3206.67,1632.5 3228.75,1654.58 ?.8@3274.58,1654.58 ; ?.47@3215.83,1430 3215.83,1408.33 3230.42,1393.75 3288.75,1393.75 3279.58,1402.08 3267.08,1412.92 3257.5,1399.58 3272.5,1400.42 3276.67,1400 3266.25,1405
  TopLayer w10.94: 2764.17,1476.67 2764.17,1486.25 2787.92,1486.25 2787.92,1416.25 2799.17,1416.25 2799.17,1357.5 2807.5,1340.42 2782.5,1340.42 2771.67,1345.42 2757.92,1345.42 2757.92,1485.42 2766.25,1493.75 2785,1493.75 ; 2767.92,1352.08 2774.58,1351.25 2784.17,1347.5 ; 2787.92,1412.92 2787.92,1358.33 2792.08,1345.83 2794.17,1345.83 2794.17,1363.33 2790.42,1411.25 ; v1@2876.67,1492.5 2877.92,1491.25 2902.92,1491.25 2905.83,1492.5 2901.25,1497.92 2896.25,1508.75 2896.25,1517.92 2898.33,1527.92 2902.92,1532.08 2900,1545.42 2878.75,1523.75 2878.75,1494.58 2887.92,1496.25 2883.33,1509.17 2887.5,1522.5 2891.67,1531.25 2886.25,1507.92 2886.67,1502.08 2890.42,1500 2892.08,1500 ; 3192.5,1622.5 3175.83,1627.08 3190,1624.58 3236.67,1577.92 3236.67,1648.75 3226.25,1648.75 ; 3371.67,1339.17 3372.92,1339.17 3395,1317.08
  TopLayer w11.94: 2724.58,1169.58 2727.08,1160.83 2748.75,1162.08 ; 2760.42,1167.92 2760.42,1104.58 2715.42,1104.58 2715.42,1187.08 2718.33,1182.5 2728.75,1175 2738.33,1170.83 2746.25,1169.17 2759.58,1171.25 2773.33,1177.08 2782.92,1172.92 2796.25,1169.17 2763.33,1169.17 ; 2881.25,1140.42 2875.42,1138.75 2877.92,1140 2900,1144.17 2898.75,1114.58 2866.25,1112.5 2861.25,1126.25 2870,1145.83 2883.33,1153.33 2908.75,1153.33 2908.75,1105.42 2856.25,1105.42 2856.25,1140.83 2871.67,1156.25 v1@2882.08,1156.25 ; ?.1@3015.83,1121.67 3016.67,1114.17 3039.17,1111.25 3051.25,1115.42 3052.5,1121.25 3014.58,1125.83 3014.17,1143.33 3015.42,1132.92 3060,1132.92 3060,1105.42 3006.25,1105.42 3006.25,1156.25 3008.33,1156.25 3035.83,1128.75 ?.1@3035.83,1126.67 ; v1@3164.58,1150.83 3162.5,1150.83 3156.25,1144.58 3156.25,1102.5 3208.75,1102.5 3208.75,1132.92 3187.92,1132.92 3167.08,1153.75 3165.83,1145.42 3165.83,1121.25 3165.83,1109.17 3199.58,1110.42 3201.25,1120.83 3200.83,1122.92 3178.75,1119.17 3177.92,1120.42 3169.58,1139.17 ; v1@3332.5,1150 3314.17,1150 3305.83,1141.67 3305.83,1104.17 3357.92,1104.17 3357.92,1150.83 v1@3339.17,1150.83 ; ?.1@3332.92,1117.5 3347.08,1110 3336.67,1125 3329.58,1139.58 3324.17,1143.75 3312.92,1133.75 3315.83,1113.33 3347.08,1115.83 3348.33,1142.92 3335,1143.33 ; 3342.5,1339.17 3371.67,1339.17 ; 3473.33,1147.08 3481.25,1156.25 v1@3480.83,1149.58 ; v1@3609.17,1151.67 3603.33,1151.67 3603.33,1104.17 3656.67,1104.17 3656.67,1122.92 3628.75,1150.83 3610.42,1150.83 3611.25,1115.83 3648.33,1113.75 3640,1130.42 3617.08,1148.75 3619.17,1136.25 ?.1@3631.25,1120.83
  TopLayer w12.94: 3341.25,1340.42 3342.5,1339.17
  TopLayer w13.94: 2958.75,1871.67 2951.67,1880.83 2928.75,1894.58 2920.42,1891.67 2982.92,1848.33 2979.17,1860.42 2939.58,1903.75 2903.33,1903.75 2976.67,1834.17 2993.75,1855.83 2980.42,1862.08 ; 3172.5,1628.75 3214.17,1628.75 3214.17,1627.5 3153.33,1627.5 3153.33,1641.25 3219.58,1641.25 3219.58,1639.58 ; 3196.25,1626.25 3227.08,1593.33 3227.5,1641.25 3215.83,1637.5 3191.67,1630 3219.58,1614.17 3218.33,1633.33 v1@3211.67,1631.67 ; 3469.17,1254.17 3480,1238.75 3478.33,1218.75 3466.67,1222.08 3468.33,1245.42 v1@3471.67,1230
  TopLayer w14.94: v1@1021.67,914.58 1027.5,924.58 ; v1@1022.08,920.42 1012.92,920 1055,920 v1@1052.92,913.33 ; v1@1053.33,920.42 1390,920.42 1390,957.92 1387.92,968.75 1380.42,968.75 ?.1@1380.42,929.58 ; v1@3283.75,1396.25 3285.42,1396.25 3341.25,1340.42
  TopLayer w20.94: 2727.92,1153.33 2744.58,1156.25
  TopLayer w21.94: 2744.58,1156.25 2745.42,1119.17 2727.5,1120.83 2722.92,1145 2735,1131.67 ?.1@2746.25,1119.58
  BottomLayer w3.94: 2493.33,2237.08 2577.92,2237.08 2620.42,2279.58 2726.67,2279.58 2609.58,2279.58 2608.33,2280.83 2608.33,2313.75 2585.83,2336.25 2495,2336.25 2579.17,2336.25 2582.08,2339.17 2620.83,2377.92 2715.83,2377.92 2731.67,2393.75 2731.67,2668.75 2724.58,2675.83 2639.17,2675.83 2603.33,2640 2603.33,2585.42 2611.67,2577.08 2712.5,2577.08 2731.67,2557.92 2731.67,2490.42 2718.75,2477.5 2610.83,2477.5 2586.25,2452.92 2532.08,2452.92 2496.67,2417.5 2496.67,2124.17 2493.75,2121.25 ; 3142.5,2126.25 3143.33,2127.08 3143.33,2424.58 3170.83,2452.08 3217.92,2452.08 3249.58,2420.42 3249.58,2352.5 3238.75,2341.67 3141.67,2341.67 3242.08,2341.67 3249.58,2334.17 3249.58,2257.92 3233.33,2241.67 3142.5,2241.67 ; 3362.5,2280 3360.83,2278.33 3247.92,2278.33 3247.92,2377.5 3380.42,2377.5 3380.42,2477.08 3252.08,2477.08 3252.08,2576.67 3378.75,2576.67 ; 3770.42,2776.67 4040,2776.67 4041.25,2777.92 4041.67,2777.5 ; 3785.42,1951.25 3968.75,1951.25 3886.25,1951.25 3886.25,1846.67 3886.25,2060 3885.42,2060.83 3869.58,2076.67 3808.75,2076.67 3786.25,2054.17 3786.25,1865.83 3790.42,1861.67 ; 3792.92,2120.42 3794.17,2121.67 3794.17,2423.75 3825.42,2455 3904.17,2455 3926.67,2477.5 4033.75,2477.5 4037.92,2473.33 4037.92,2404.58 4012.08,2378.75 3923.33,2378.75 3898.33,2353.75 3898.33,2302.92 3921.25,2280 3922.92,2278.33 4021.25,2278.33 4038.33,2261.25 4038.33,2200 4015,2176.67 3923.33,2176.67 3902.5,2197.5 3902.5,2241.67 3899.58,2238.75 3793.33,2238.75 3794.17,2239.58 3794.17,2337.92 3890.83,2337.92 ; 3913.33,2576.25 4027.08,2576.25 4043.75,2592.92 4043.75,2645.83 4014.17,2675.42 3936.67,2675.42 3935.83,2674.58
  BottomLayer w4.87: 3397.5,906.25 3397.5,786.25 3497.08,786.25 3497.08,909.17 3498.33,909.17
  BottomLayer w4.94: 3015.83,1669.17 3101.67,1669.17 3104.58,1666.25 3156.25,1666.25 3082.5,1666.25 ; 3081.25,1667.08 3070,1667.08 3070.83,1666.25 3096.67,1666.25
  BottomLayer w5.87: 3212.08,906.25 3215,909.17 3498.33,909.17
  BottomLayer w10.94: 459.17,2783.33 474.17,2796.25 467.08,2798.75 466.67,2797.92 ; 464.17,2665 461.25,2682.5 463.33,2675 475.83,2662.5 ; 570.42,2802.08 587.5,2794.58 597.5,2781.25 598.75,2779.17 ; 577.08,2659.58 590.42,2671.67 605,2692.08
  BottomLayer w13.94: 630,2630 625.42,2537.92 633.75,2558.75 648.33,2577.08 681.67,2609.58 681.67,2626.67 641.67,2620.42 635,2577.5 674.58,2613.75 670.42,2614.58 649.58,2606.25 643.33,2590.83 655.42,2617.5
  other v1: 710.83,781.67 734.17,786.67 735,810 708.33,813.33 707.5,835 735,840.83 709.17,865.83 735,865.83 1479.17,885 707.5,889.17 735,896.67 1052.5,912.5 807.5,913.33 1025,913.33 736.67,922.5 710,924.17 1054.17,936.67 1025,940 1053.33,960 1025,968.33 1025,995 1055.83,995 1056.67,1019.17 1025,1021.67 1052.5,1049.17 1024.17,1050 3609.17,1155 3008.33,1155.83 3163.33,1155.83 3332.5,1155.83 3480,1156.67 2883.33,1158.33 1700.83,1169.17 1729.17,1170 2797.92,1169.58 1728.33,1194.17 1701.67,1199.17 1701.67,1220 1728.33,1220.83 3475,1221.67 1290.83,1228.33 1728.33,1248.33 1262.5,1251.67 1699.17,1252.5 2281.67,1265 2389.17,1265.83 2250.83,1266.67 2305,1268.33 2331.67,1267.5 2363.33,1267.5 1729.17,1275 1700,1276.67 2250.83,1290 2361.67,1290 2307.5,1292.5 2331.67,1292.5 2388.33,1291.67 2276.67,1294.17 1731.67,1304.17 1700,1306.67 1355.83,1326.67 1387.5,1326.67 1443.33,1326.67 1469.17,1328.33 1415.83,1329.17 1333.33,1330.83 1728.33,1331.67 1700,1333.33 3697.5,1349.17 1470.83,1355 1361.67,1355.83 1391.67,1355.83 1415.83,1355.83 1334.17,1356.67 1443.33,1356.67 1730,1358.33 1700.83,1360.83 1169.17,1394.17 1144.17,1395 3289.16,1395 3549.17,1395 1170.83,1419.17 1143.33,1423.33 3357.5,1425 1140.83,1447.5 1170.83,1448.33 1170.83,1473.33 1145.83,1475 2883.33,1495 3680,1633.33 3210.83,1635 3651.67,1635.83 3621.67,1636.67 3649.17,1663.33 3679.17,1663.33 3620.83,1665.83 3463.33,1675.83 3465,1705.83 3072.5,1740.83 1138.33,1759.17 1168.33,1765.83 1166.67,1790 1138.33,1793.33 1164.17,1820 1137.5,1820.83 1164.17,1846.67 1140.83,1849.17 1481.67,1944.17 1420.83,1945 1450,1945 1510.83,1945 1095,1965.83 1151.67,1967.5 1178.33,1968.33 1071.67,1969.17 1125.83,1972.5 1150.83,1992.5 1176.67,1993.33 1095.83,1995 1071.67,1997.5 1125.83,2000 2708.34,2020 1153.33,2025 1070,2028.33 1179.17,2028.33 1125.83,2029.17 1095.83,2030 1071.67,2055 1097.5,2055 1150.83,2056.67 1177.5,2056.67 1122.5,2057.5 1885.83,2265.83 1530.83,2335 1198.33,2335.83 1557.5,2335.83 1145.83,2336.67 1172.5,2336.67 1225,2336.67 1257.5,2336.67 1280.83,2336.67 1471.67,2336.67 1503.33,2336.67 1311.67,2337.5 1335,2337.5 1365.83,2337.5 1391.67,2337.5 1418.33,2337.5 1446.67,2337.5 1120,2340 1145,2359.17 1257.5,2360 1394.17,2360.83 1417.5,2360.83 1120.83,2361.67 1200.83,2361.67 1280,2361.67 1334.17,2362.5 1362.5,2362.5 1448.33,2361.67 1476.67,2362.5 1529.17,2363.33 1172.5,2364.17 1229.17,2364.17 1310,2364.17 1556.67,2364.17 1502.5,2365.83 3742.5,2576.67 3051.67,2578.33 3713.33,2578.33 2440.83,2579.17 3079.17,2580.83 2413.33,2583.33 3740,2601.67 3713.33,2603.33 3051.67,2607.5 2412.5,2609.17 2440,2610 3079.17,2610.83 3740.83,2630 2440,2630.83 3713.33,2630.83 3050.83,2634.17 2411.67,2635.83 3079.17,2637.5 3740.83,2656.67 3710.83,2659.17 2440,2660 3053.33,2661.67 3079.17,2664.17 2413.33,2665.83 3712.5,2685 3740,2685 2439.17,2687.5 3079.17,2689.17 2412.5,2690.83 3050.83,2690.83 3712.5,2714.17 3739.17,2715 2439.17,2718.33 3049.17,2717.5 2410.83,2719.17 3079.17,2719.17 2579.17,2893.33 2550,2894.17 2576.67,2918.33 2605,2918.33 2550.83,2919.17 3476.67,2930 3449.17,2930.83 3499.17,2930.83 3449.17,2959.17 3472.5,2959.17 3499.17,2959.17
UnNamedNet4: ?.1@1337.92,750.42 ?.1@1359.58,1223.33 ?.1@2183.75,822.08 ?.1@3697.5,1247.08 ?.2@890.42,1397.08 ?.2@1257.08,1182.08 ?.2@1561.08,748.75 ?.2@2164.58,2727.08 ?.2@2187.75,922.08 ?.2@2348.75,2150.42 ?.2@2446.5,2186.75 ?.2@2547.91,2724.5 ?.2@2812.08,2727.08 ?.2@2998.75,2148.75 ?.2@3093.58,2191.33 ?.2@3193.75,2727.42 ?.2@3462.92,2729.17 ?.2@3650.42,2144.58 ?.2@3744.42,2188 ?.2@3845.41,2725.33 ?.3@1354.58,1107.75 ?.3@1567.08,1213.08 ?.4@2446.5,2286.75 ?.4@2547.91,2521.5 ?.4@3093.58,2291.33 ?.4@3193.75,2524.42 ?.4@3744.42,2288 ?.4@3845.41,2522.33 ?.5@3624.58,1335.25 ?.6@2446.5,2389.75 ?.6@3093.58,2394.33 ?.6@3744.42,2391 pad.50 | length 10610.3
  TopLayer w9.94: ?.2@2176.25,2738.33 2176.25,2742.08 2353.33,2919.17 v1@2392.92,2919.17 ; ?.2@2347.5,2150 2410,2150 2441.25,2181.25 2452.92,2181.25 2500,2134.17 2585,2134.17 2617.5,2101.67 2617.5,2099.17 2618.75,882.92 2650,851.67 v1@2650,783.75 ; 2587.5,2135.83 2632.5,2180.83 v1@2683.33,2180.83 ; 2650.42,808.75 3531.25,806.25 v1@3592.5,806.25 ; ?.2@3010.42,2149.58 3050,2149.58 ?.2@3087.5,2187.08 ; ?.2@3102.08,2185 3145.83,2141.25 3238.75,2141.25 3277.5,2180 v1@3337.5,2180 ; ?.5@3623.75,1326.25 3623.75,1262.5 3640,1246.25 3685,1246.25 ?.1@3687.5,1248.75 ; ?.2@3658.33,2144.17 3698.33,2144.17 ?.2@3735,2180.83 ; ?.1@3700,1246.25 3722.08,1246.25 3743.33,1225 v1@3745.42,1225
  TopLayer w35.94: ?.2@1259.17,1182.08 ?.1@1347.92,1182.08 ; ?.1@1363.75,1213.33 ?.1@1363.75,1223.33 ; ?.1@1369.17,1212.08 ?.3@1550.42,1212.08
  TopLayer w36.94: ?.2@900.83,1387.08 954.17,1333.75 1253.33,1333.75 ?.1@1363.75,1223.33
  TopLayer w37.94: ?.3@1360,1120 1360.83,1120.83 ?.1@1360.83,1199.17
  BottomLayer w9.94: v1@2390.83,2915 2390.83,2884.58 2539.17,2736.25 ?.2@2539.17,2732.5 ; ?.2@2448.33,2191.67 2448.33,2428.33 2544.17,2524.17 2544.17,2532.5 2499.17,2577.5 2499.17,2676.67 2600.42,2777.92 2761.25,2777.92 ?.2@2807.5,2731.67 ; v1@2692.5,2180.42 3080.42,2180.42 3093.33,2193.33 3093.33,2432.5 3189.58,2528.75 3189.58,2536.67 3144.17,2582.08 3144.17,2681.25 3244.17,2781.25 3409.17,2781.25 ?.2@3460,2730.42 ; v1@3346.67,2182.08 3719.17,2182.08 3745,2207.92 3745,2305.42 3745,2431.25 3842.5,2528.75 3842.5,2531.25 3793.75,2580 3793.75,2678.33 3835,2719.58 ?.2@3839.58,2719.58
  BottomLayer w10.94: v1@3594.58,808.75 3594.58,876.67 3710,992.08 3710,1188.75 v1@3744.17,1222.92
  BottomLayer w21.94: 1348.75,813.75 1560,813.75 1561.25,812.5 ; ?.2@1560.42,757.08 1560.42,805.42 1576.67,821.67 2165.83,823.33 ?.1@2170,827.5 ; ?.2@2185.42,922.92 2185.42,824.17 2250.83,758.75 2628.33,758.75 v1@2649.58,780
  BottomLayer w37.94: pad.50@1166.25,1333.75 1166.25,1076.67 1333.33,909.58 1333.33,770.42 ?.1@1334.58,769.17
  other v1: 2651.67,779.17 3595,806.67 3745,1224.17 3340,2179.17 2689.17,2180 2392.5,2919.17
UnNamedNet5: ?.4@4049.75,849.16 ?.34 | length 1630.2
  TopLayer w9.94: ?.34@2982.92,1554.58 3051.25,1554.58 3084.58,1587.92 v1@3084.58,1608.75
  BottomLayer w9.94: v1@3088.33,1605.42 3123.75,1605.42 3457.5,1271.67 3995.42,1271.67 4067.5,1199.58 4067.5,861.25 ?.4@4061.67,855.42
  other v1: 3085.83,1604.17
UnNamedNet6: ?.3@3945.75,849.16 ?.37 | length 1652.4
  TopLayer w9.94: v1@2985.42,1454.58 ?.37@3016.67,1454.58
  BottomLayer w9.94: v1@2974.58,1452.5 2947.5,1425.42 2947.5,1378.75 3014.17,1312.08 3380,1312.08 3440.42,1251.67 3983.33,1251.67 4040.83,1194.17 4040.83,945.42 3957.92,862.5 ?.3@3957.5,862.5
  other v1: 2977.5,1455
UnNamedNet7: ?.1@1025.42,1160.42 ?.1@1088.33,1224.58 ?.1@1534.58,1052.92 ?.1@1590.42,982.5 ?.1@2575.42,1404.58 ?.1@2763.75,1958.75 ?.1@2806.67,1122.5 ?.1@2830.42,1458.33 ?.1@2958.33,1121.25 ?.1@3107.92,1121.25 ?.1@3257.08,1122.08 ?.1@3405.42,1122.08 ?.1@3417.08,1231.25 ?.1@3554.58,1120.42 ?.1@3703.75,1120.42 ?.2@1354.58,1018.75 ?.2@1617.42,1053.75 ?.2@2850,2019.67 ?.2@3411.67,1872.17 ?.2@3846.75,849.17 ?.4@1139.58,1018.75 ?.9@3297.92,1673.42 ?.24 ?.36 ?.48 pad.51 pad.54 | length 6810.6
  TopLayer w9.94: ?.2@1365,1032.92 ?.2@1372.92,1032.92 ; ?.1@1542.92,1053.75 ?.2@1614.17,1053.75 ; ?.1@1591.25,998.75 1591.25,1027.5 ?.2@1613.75,1050 ; ?.1@2802.92,1130.83 2858.33,1186.25 3020.83,1186.25 3043.33,1163.75 3127.92,1163.75 3150,1185.83 3174.17,1185.83 3195.42,1164.58 3283.75,1164.58 3302.5,1183.33 3641.67,1183.33 3700.83,1124.17 ?.1@3703.33,1124.17 ; v1@2833.75,1359.17 2830.83,1362.08 2830.83,1453.33 2836.25,1458.75 2916.67,1458.75 2957.92,1500 2957.92,1513.75 2959.17,1515 3042.08,1515 3118.75,1591.67 3176.25,1591.67 3235.83,1532.08 ?.48@3235.83,1454.58 ; ?.2@2848.33,2016.25 2833.33,2016.25 2772.08,1955 2772.08,1935.42 2814.58,1892.92 2860.42,1892.92 2959.58,1793.75 ?.24@3015.83,1793.75 ; ?.1@2957.5,1124.17 2957.5,1182.92 ; ?.24@3018.75,1787.92 3018.75,1743.33 3088.75,1673.33 ?.9@3272.92,1673.33 ; ?.1@3107.92,1129.17 3107.92,1160 ; 3120,1670.42 3120,1594.58 3120.42,1594.17 ; ?.48@3240,1453.75 3274.58,1453.75 3366.67,1361.67 3415,1361.67 3518.33,1258.33 v1@3518.33,1187.08 ; ?.1@3257.92,1123.75 3257.92,1161.25 ; ?.9@3325,1672.92 3340,1672.92 3353.75,1686.67 3353.75,1859.58 3365.83,1871.67 ?.2@3403.75,1871.67 ; ?.1@3404.58,1128.33 3404.58,1179.17 ; 3413.33,1185.83 ?.1@3413.33,1226.67 ; ?.1@3555,1123.75 3555,1181.25 ; v1@3676.67,1001.25 3677.5,1001.25 3687.5,991.25 3831.25,991.25 3847.5,975 ?.2@3847.5,844.17
  TopLayer w10.94: ?.2@1372.92,1032.92 1443.33,1103.33 1514.17,1103.33 1535.42,1082.08 ?.1@1535.42,1062.92
  TopLayer w36.94: ?.1@1020.42,1158.75 1090,1158.75 1150.42,1098.33 1150.42,1035.83 1167.5,1018.75 ?.2@1340,1018.75 ; 1087.92,1160.42 ?.1@1087.92,1170 ; 1265.42,1031.25 pad.51@1265.42,1115.83
  TopLayer w37.94: pad.54@2514.17,1248.33 2514.17,1357.92 ?.1@2563.75,1407.5
  BottomLayer w10.94: v1@3520.42,1184.58 3640.42,1184.58 3675,1150 v1@3675,1004.17
  BottomLayer w37.94: pad.51@1270.42,1122.92 1326.25,1122.92 2437.92,1125 2514.17,1201.25 2514.17,1242.08 2636.67,1364.58 v1@2835.42,1364.58
  other v1: 3676.67,1003.33 3517.5,1183.33 2836.25,1361.67
UnNamedNet8: ?.1@1832.08,2188.75 ?.1@3892.92,1157.08 ?.1@4247.08,2278.75 ?.1@4247.92,1953.75 ?.1@4247.93,1217.08 ?.3@1665.08,748.75 ?.4@3549.58,1335.25 | length 8307.7
  TopLayer w9.94: v1@1434.58,847.08 1627.08,847.08 1661.25,812.92 ?.3@1661.25,757.92 ; ?.1@1847.5,2189.17 1868.33,2189.17 1978.33,2079.17 2583.75,2079.17 2597.5,2065.42 2597.5,1510 v1@2585.42,1497.92 ; ?.4@3549.17,1329.58 3549.17,1293.33 3637.08,1205.42 3705.83,1205.42 3756.25,1155 ?.1@3882.5,1155 ; ?.1@3904.17,1155.83 4186.25,1155.83 4255.42,1225 4256.25,1225 4317.5,1286.25 4317.5,2247.08 4282.5,2282.08 ?.1@4266.67,2282.08 ; ?.1@4258.33,1952.5 4287.5,1952.5 4317.08,1922.92
  BottomLayer w10.94: v1@1431.25,850 1431.25,892.5 1222.92,1100.83 1222.92,1321.67 1296.25,1395 2479.58,1395 2581.25,1496.67 v1@2584.17,1496.67 ; ?.3@1678.75,735 1678.75,730.42 1702.5,706.67 3825,706.67 3894.17,775.83 3894.17,1108.75 v1@3939.17,1153.75
  other v1: 1431.67,846.25 3942.5,1156.67 2585,1496.67
UnNamedNet9: ?.2@3962.92,2725 ?.3@3845.41,2626.33 ?.4@3836.33,2001.42 | length 1288.7
  TopLayer w9.94: ?.4@3842.92,1992.08 3847.08,1992.08 3886.67,1952.5 3886.67,1865.83 3907.5,1845 3975.42,1845 4012.92,1882.5 4012.92,2677.08 ?.2@3970.83,2719.17
  BottomLayer w9.94: ?.3@3850.83,2635 3937.08,2721.25 ?.2@3952.5,2721.25
UnNamedNet10: ?.1@3845.42,2829.74 ?.1@3962.92,2830 ?.3@3836.33,1900.42 | length 1332
  TopLayer w9.94: ?.3@3838.33,1889.17 3838.33,1870.83 3887.08,1822.08 3998.33,1822.08 4037.08,1860.83 4037.08,2753.33 3977.92,2812.5 ?.1@3977.92,2815
  BottomLayer w9.94: ?.1@3865.42,2830 ?.1@3965.42,2830
UnNamedNet11: ?.2@3255.42,2020.08 ?.2@3312.08,2725 ?.2@3736.33,2001.42 ?.3@3193.75,2628.42 | length 1865.2
  TopLayer w9.94: ?.2@3257.08,2017.92 v1@3257.08,2048.33 ; v1@3260.42,2054.17 3269.58,2063.33 3343.75,2063.33 3386.67,2106.25 3386.67,2842.92 3349.17,2880.42 3271.67,2880.42 3260.42,2869.17 3260.42,2777.92 ?.2@3307.08,2731.25
  BottomLayer w9.94: ?.3@3190,2608.33 3295.83,2714.17 ?.2@3295.83,2721.67 ; v1@3261.67,2054.17 3687.5,2054.17 ?.2@3732.5,2009.17
  other v1: 3257.5,2051.67